# Altium PCB Voron_Circuit_PCB.PcbDoc
Units mil, origin at the board's own origin, x right, y up, seen from the top; angles counter-clockwise.
Board outline 1626.89 x 1221.82 mil, 2 copper layers (Top Layer, Bottom Layer); 6 components, 15 nets, 35 pads, 0 vias.
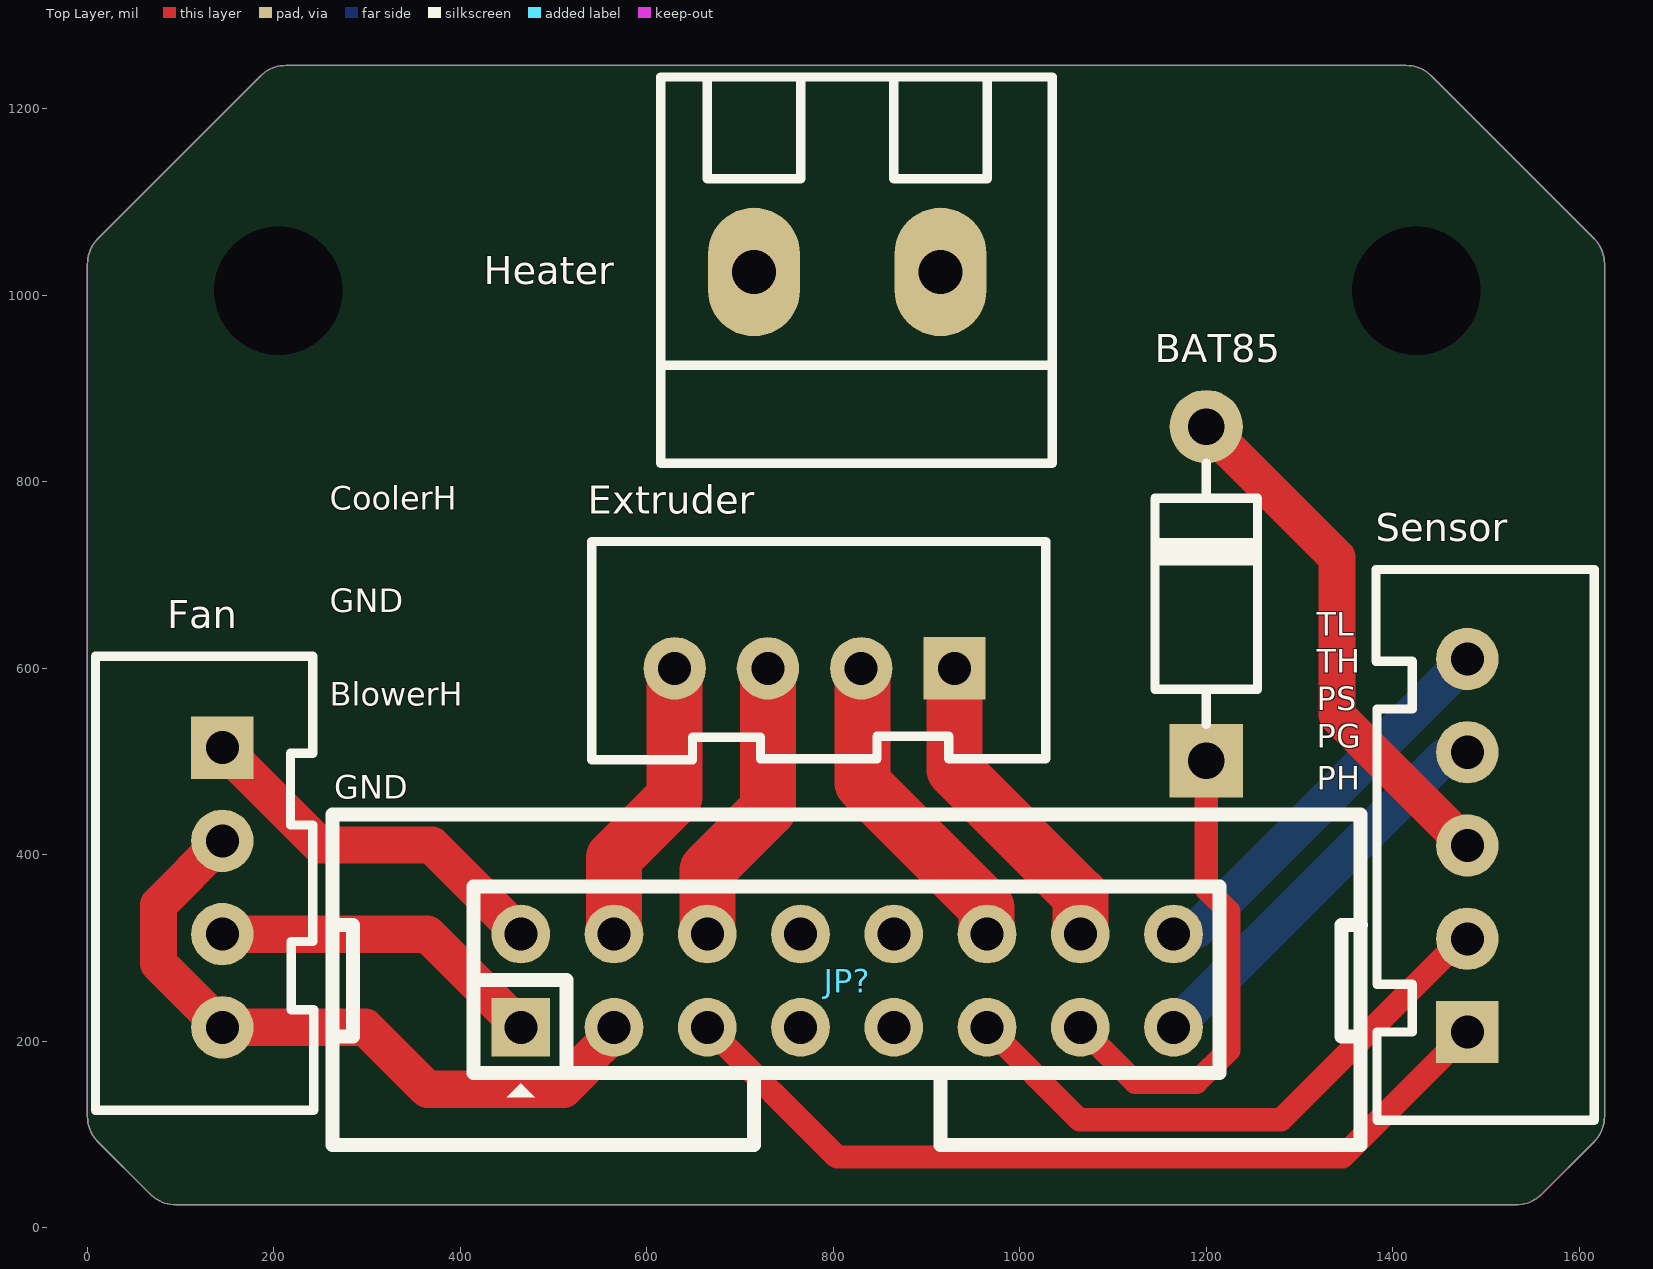
[diagram p0: Top Layer view]
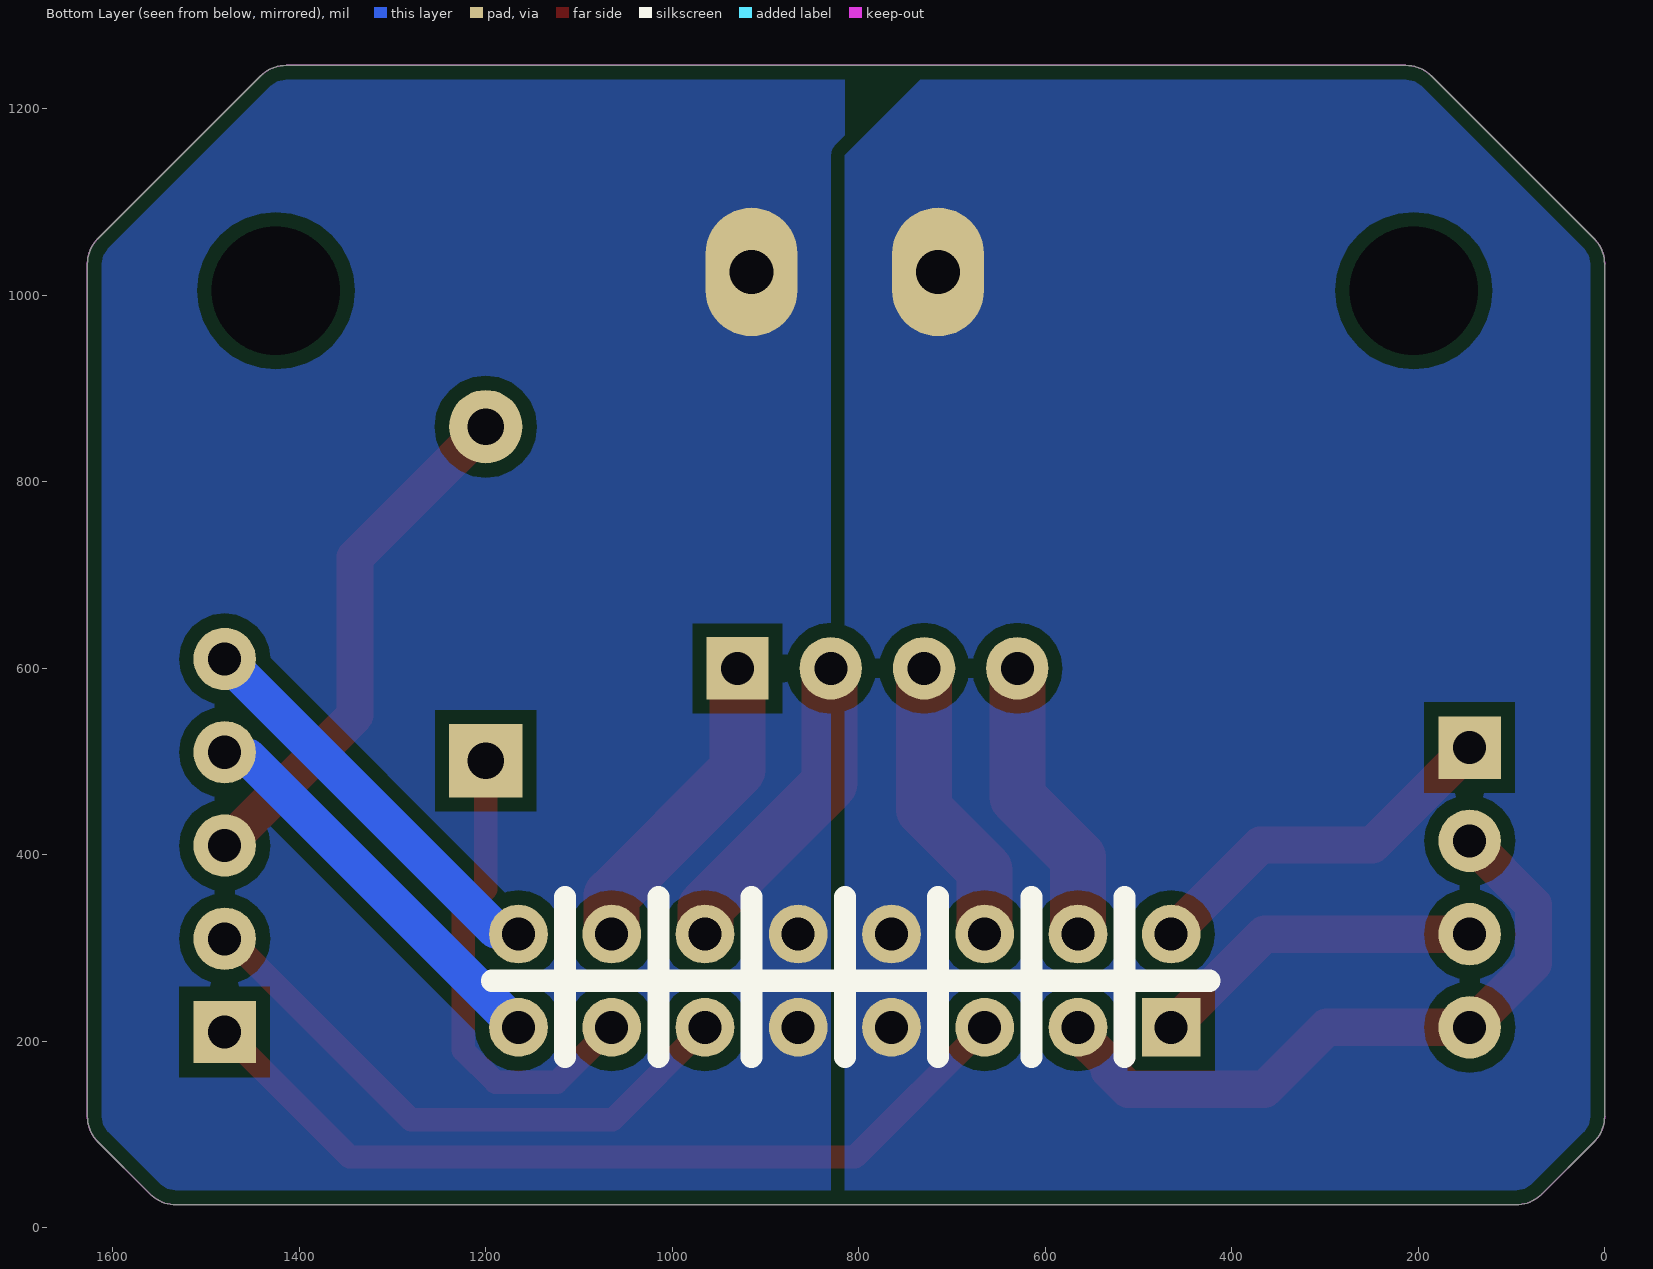
[diagram p1: Bottom Layer view, seen from below]

## Layer stack, top to bottom
Top Solder: solder mask 0.4, Solder Resist, Dk 3.5
Top Layer: signal copper 1.4
Dielectric 1: dielectric 12.6, FR-4, Dk 4.8
Bottom Layer: signal copper 1.4
Bottom Solder: solder mask 0.4, Solder Resist, Dk 3.5

## Board outline
67.46,36.23 11.78,91.9 cw(c39.62,119.74) 0.25,119.74 0.25,1033.36 cw(c39.62,1033.36) 11.78,1061.19 185.57,1234.98 cw(c213.41,1207.14) 213.41,1246.51 1413.98,1246.51 cw(c1413.98,1207.14) 1441.82,1234.98 1615.6,1061.19 cw(c1587.77,1033.36) 1627.14,1033.36 1627.14,119.74 cw(c1587.77,119.74) 1615.6,91.9 1559.93,36.23 cw(c1532.09,64.06) 1532.09,24.69 95.3,24.69 cw(c95.3,64.06)

## Design rules (kind name [scope] priority, off if disabled: settings)
Clearance Clearance_1 [All] p1: gap=15 ignorepadtopadclearanceinfootprint=FALSE
Clearance [InPolygon] p2: gap=40 ignorepadtopadclearanceinfootprint=FALSE
PlaneClearance [All] p1: clearance=40
PlaneConnect [All] p1: planeconnectstyle=Direct reliefexpansion=20 reliefentries=4 reliefconductorwidth=10 reliefairgap=10
PolygonConnect [All] p1: connectstyle=Direct reliefconductorwidth=10 reliefentries=4 polygonreliefangle="90 Angle" airgapwidth=10
RoomDefinition Schematic [InComponentClass('Schematic')] p1: confinementstyle=ConfineIn formatcopy=TRUE lockcomponents=FALSE outline 0,0 1635,0 1635,1250 0,1250
RoutingVias [All] p1: holewidth=28 width=50 viastyle="Through Hole" minholewidth=28 minwidth=50 maxholewidth=28 maxwidth=50
SolderMaskExpansion [All] p1: expansion=4 istentingtop=FALSE
Width [All] p1: maxlimit=80 minlimit=10 preferedwidth=40
28 further rules are at their usual default settings.

## Components (designator, comment, footprint, x,y, rotation, side; value= is the part's Value field where it differs from the comment)
BAT85 "FR107" DO-41 1200,680 r90 top
Extruder "HDR-1X4" XH2.54-LI-4P 780,600 r180 top
Fan "HDR-1X4" XH2.54-LI-4P 145,365 r270 top
Heater "HDR-1X2" KF128-5.08-2P 815,1025 r180 top
JP? "Header 8X2" IDC2.54-LI-2x8P 465,215 r0 top
Sensor "HDR-1X5" XH2.54-LI-5P 1480,410 r90 top

## Footprints (in the part's own frame and the unit in brackets; to place one, negate y for a bottom-side part, rotate by r counter-clockwise, add the part's x,y. Pads: shape width x height; smd on the part's side, far side on the other; paste and mask are expansions set on the pad)
DO-41 [mm] "2.6*9.1mm(直径，脚距）"
  rect 2x2 hole 1: 1(-4.55,0)
  round 2 hole 1: 2(4.55,0)
  silkscreen extent -3.56,-1.4 3.56,1.4, body extent -4.92,-1.29 4.98,1.31, height 2.65
IDC2.54-LI-2x8P [mm] "16P简易牛角座 淘宝ID:黄晶宝石   店铺网址:https://shop463601444.taobao.com"
  rect 1.6x1.6 hole 0.9: 1(0,0)
  round 1.6 hole 0.9: 2(0,2.54) 3(2.54,0) 4(2.54,2.54) 5(5.08,0) 6(5.08,2.54) 7(7.62,0) 8(7.62,2.54) 9(10.16,0) 10(10.16,2.54) 11(12.7,0) 12(12.7,2.54) 13(15.24,0) 14(15.24,2.54) 15(17.78,0) 16(17.78,2.54)
  silkscreen extent -5.14,-3.2 22.89,5.8, body extent -5.08,-3.08 22.86,5.77, height 9.17
KF128-5.08-2P [mm] "螺钉式接线端子，脚距5.08mm"
  oval 2.5x3.5 hole 1.2: 1(-2.54,0) 2(2.54,0)
  silkscreen extent -5.59,-5.31 5.08,5.21, body extent -5.58,-5.3 5.08,5.2, height 14.15
XH2.54-LI-4P [mm] "接插件，4P  淘宝ID:黄晶宝石   店铺网址:https://shop463601444.taobao.com"
  rect 1.7x1.7 hole 0.9: 1(-3.81,0)
  round 1.7 hole 0.9: 2(-1.27,0) 3(1.27,0) 4(3.81,0)
  silkscreen extent -6.3,-3.45 6.07,2.49, body extent -6.31,-3.3 6.31,2.4, height 7.03
XH2.54-LI-5P [mm] "接插件，5P  淘宝ID:黄晶宝石   店铺网址:https://shop463601444.taobao.com"
  rect 1.7x1.7 hole 0.9: 1(-5.08,0)
  round 1.7 hole 0.9: 2(-2.54,0) 3(0,0) 4(2.54,0) 5(5.08,0)
  silkscreen extent -7.48,-3.45 7.52,2.49, body extent -7.58,-3.3 7.58,2.4, height 7.03

## Part data
BAT85: "快恢复整流二极管", BOM名称=快恢复二极管, 学习资源=https://shop463601444.taobao.com, 属性=700V/1A, 版权归属="封装库来自淘宝 ID：黄晶宝石"
Extruder Fan: library part "Header 4", "4P接插件", BOM名称=4P接插件, 学习资源=https://shop463601444.taobao.com, 版权归属="封装库来自淘宝 ID：黄晶宝石"
Heater: library part "Header 2", "2P接插件", BOM名称=2P接插件, 学习资源=https://shop463601444.taobao.com, 版权归属="封装库来自淘宝卖家 ID：黄晶宝石"
JP?: "8*2P接插件", BOM名称=8*2P接插件, 学习资源=https://shop463601444.taobao.com, 版权归属="封装库来自淘宝 ID：黄晶宝石"
Sensor: library part "Header 5", "5P接插件", BOM名称=5P接插件, 学习资源=https://shop463601444.taobao.com, 版权归属="封装库来自淘宝 ID：黄晶宝石"

## Free pads (board coordinates)
  round 129.92 hole 137.8: ""(205,1005) ""(1425,1005)

## Nets (pads, with @x,y where several pads share a name; then routed paths per layer and width w, separated by ;. In a path a pad name is that pad's centre, name@x,y a point inside that pad or via, vN(x,y) a via of type N, cw(c..) or ccw(c..) an arc to the next point about the centre after c; other vN are vias at no path point)
BlowerHIGH: Fan.3 JP?.1 | length 361.4
  Top Layer w40: Fan.3 365,315 JP?.1
CoolerHIGH: Fan.1 JP?.2 | length 402.8
  Top Layer w40: Fan.1 249.53,410.47 369.53,410.47 JP?.2
FanGND: Fan.2 Fan.4 JP?.3 | length 739.1
  Top Layer w40: Fan.2 76.54,346.54 76.54,283.46 Fan.4 298.39,215 364.89,148.5 510.99,148.5 531.5,169.01 531.5,175.27 565,208.78 JP?.3
HeaterH: Heater.1 JP?.9 JP?.10
HeaterL: Heater.2 JP?.7 JP?.8
Motor1: Extruder.1 JP?.14 | length 340.9
  Top Layer w60: Extruder.1 930,491.26 1065,356.26 JP?.14
Motor2: Extruder.2 JP?.12 | length 340.9
  Top Layer w60: Extruder.2 831.33,598.67 831.33,476.8 964.43,343.7 964.43,315.57 JP?.12
Motor3: Extruder.3 JP?.6 | length 311.9
  Top Layer w60: JP?.6 665,383.83 730,448.83 Extruder.3
Motor4: Extruder.4 JP?.4 | length 311.9
  Top Layer w60: JP?.4 565,396.97 630,461.97 Extruder.4
PL08NG: JP?.11 Sensor.2 | length 636.4
  Top Layer w25: JP?.11 1064,116 1280.18,116 1474.18,310 Sensor.2
PL08NH: JP?.5 Sensor.1 | length 928.1
  Top Layer w25: JP?.5 804,76 1346,76 Sensor.1
PL08NSIG: BAT85.2 Sensor.3 | length 565.1
  Top Layer w40: BAT85.2 1340.1,719.03 1340.1,549.9 Sensor.3
PL08NSIG_OUT: BAT85.1 JP?.13 | length 518
  Top Layer w25: JP?.13 1124,156 1189.44,156 1224,190.56 1224,339.44 1200,363.43 BAT85.1
THERMOH: JP?.15 Sensor.4 | length 437.2
  Bottom Layer w40: JP?.15 1454.85,504.85 1474.85,504.85 Sensor.4
THERMOL: JP?.16 Sensor.5 | length 437.2
  Bottom Layer w40: JP?.16 1169.4,319.4 1189.4,319.4 Sensor.5

## Polygon pours and split planes (outlines as drawn)
HeaterH on Bottom Layer "HeaterH" (solid, pour order 5): 813.69,1246.51 815,1245.21 815,25 1531.78,25 1532.09,24.69 1543.62,36.23 1559.93,36.23 1627.14,103.43 1627.14,1033.36 1615.6,1044.89 1615.6,1061.19 1430.28,1246.51
HeaterL on Bottom Layer "HeaterL" (solid, pour order 2): 213.41,1246.51 214.92,1245 720,1245 815,1150 815,25 85,25 0,110 0,1045 11.89,1045

## Keep-outs
Keep-Out Layer:
  the board outline again, w0.5

## Silkscreen, mask and mechanical layers (free items; w line width, h text height)
Top Overlay:
  text "CoolerH" at 260,770 h25
  text "GND" at 260,660 h25
  text "TL" at 1318.35,635 h25
  text "TH" at 1318.35,595 h25
  text "BlowerH" at 260,560 h25
  text "PS" at 1318.35,555 h25
  text "PG" at 1318.35,515 h25
  text "PH" at 1318.35,470 h25
  text "GND" at 265,460 h25
Mechanical 1:
  circle w0.5: c203.46,1003.94 r68.9
  circle w0.5: c1423.93,1003.94 r68.9
  lines w0.5: 0.25,119.74 ccw(c39.62,119.74) 11.78,91.9 67.46,36.23 ccw(c95.3,64.06) 95.3,24.69 1532.09,24.69 ccw(c1532.09,64.06) 1559.93,36.23 1615.6,91.9 ccw(c1587.77,119.74) 1627.14,119.74 1627.14,1033.36 ccw(c1587.77,1033.36) 1615.6,1061.19 1441.82,1234.98 ccw(c1413.98,1207.14) 1413.98,1246.51 213.41,1246.51 ccw(c213.41,1207.14) 185.57,1234.98 11.78,1061.19 ccw(c39.62,1033.36) 0.25,1033.36 0.25,119.74